# EAGLE board STM32F050F Base (EAGLE 6.5.0)

Size 69.85 x 22.85 mm. Coordinates in mm from the lower left corner, seen from the top.
Outline: 0,0 69.85,0 69.85,22.85 0,22.85 0,0
Copper layers (1*16): Top 0.035mm / dielectric 1.5mm / Bottom 0.035mm
Design rules "default": minimum track width 10mil, minimum drill 24mil, track to track 8mil, track to pad 8mil, pad to pad 8mil, via to via 8mil, smd to smd 8mil, copper to edge 40mil, drill to drill 8mil, minimum pad ring 10mil, minimum via ring 8mil, stop-mask expansion 4mil, vias tented up to drill 0mil, thermal gap 10mil

## Footprints (pad centres in the part's own frame; a part is rotated, then mirrored left to right if it is on the bottom)
C3216-18/T = smd 1.95 x 1.5: + 1.651,0; - -1.651,0
C3528-21/T = smd 1.778 x 2.286: + 1.524,0; - -1.524,0
C1206 = smd 1.3 x 1.6: 1 -1.524,0; 2 1.524,0
C0805 = smd 1.2 x 1.3: 1 -1.016,0; 2 1.016,0
1X01-S = drill 1.016 square: 1 0,0
SOT223 = smd 1.219 x 2.235: 1 -2.311,-3.099; 2 0,-3.099; 3 2.311,-3.099 | smd 3.6 x 2.2: 4 0,3.099
CHIP-LED0805 = smd 1.2 x 1.2: A 0,-1.05; C 0,1.05
1X05-S = drill 1.016 square: 1 -5.08,0 | drill 1.016 octagon: 2 -2.54,0; 3 0,0; 4 2.54,0; 5 5.08,0
1X03-S = drill 1.016 square: 1 -2.54,0 | drill 1.016 octagon: 2 0,0; 3 2.54,0
1X02-S = drill 1.016 square: 1 -1.27,0 | drill 1.016 octagon: 2 1.27,0
1X02/90-S = drill 1.016 square: 1 -2.54,-3.81 | drill 1.016 octagon: 2 0,-3.81
R0805 = smd 1.2 x 1.3: 1 -1.016,0; 2 1.016,0
TSSOP20 = smd 0.305 x 0.991: 1 -2.925,-2.918; 2 -2.275,-2.918; 3 -1.625,-2.918; 4 -0.975,-2.918; 5 -0.325,-2.918; 6 0.325,-2.918; 7 0.975,-2.918; 8 1.625,-2.918; 9 2.275,-2.918; 10 2.925,-2.918; 11 2.925,2.918; 12 2.275,2.918; 13 1.625,2.918; 14 0.975,2.918; 15 0.325,2.918; 16 -0.325,2.918; 17 -0.975,2.918; 18 -1.625,2.918; 19 -2.275,2.918; 20 -2.925,2.918
SMA = smd 2 x 2: A 2,0; C -2,0

## Placement (x,y rotation side)
C1  10uF 10V  [C3216-18/T]  31.75,11.43 90 top
C2  10uF 25V  [C3528-21/T]  16.51,11.43 270 top
C4  4.7uF  [C1206]  45.09,3.81 0 top
C5  0.1uF  [C0805]  48.26,6.35 0 top
C6  1uf  [C0805]  48.26,17.78 270 top
GND  [1X01-S]  66.04,3.81 0 top
IC1  [SOT223]  24.13,11.43 90 top
LED1  [CHIP-LED0805]  38.1,11.43 180 top
NRST  [1X01-S]  53.34,19.05 0 top
PA0-4  [1X05-S]  30.48,19.05 180 top
PA5-7  [1X03-S]  20.32,3.81 0 top
PA9-10  [1X02-S]  52.07,3.81 0 top
PA13-14  [1X02-S]  59.69,3.81 0 top
PB1  [1X01-S]  30.48,3.81 0 top
PF0-1  [1X02-S]  59.69,19.05 180 top
PWR  [1X02/90-S]  1.27,12.7 90 top
PWR_OUT  [1X02-S]  19.05,19.05 180 top
R1  [R0805]  35.56,12.7 270 top
U$1  STM32F050F4P6  [TSSOP20]  48.26,11.43 180 top
U$2  10MQ040  [SMA]  10.16,11.43 180 top
VDD  [1X01-S]  66.04,19.05 0 top
VDD_GND_1  [1X02-S]  41.91,19.05 180 top
VDD_GND_2  [1X02-S]  8.89,3.81 0 top
VDD_GND_3  [1X02-S]  8.89,19.05 180 top
VDD_GND_4  [1X02-S]  36.83,3.81 0 top

## Library data of the parts
C1 C2 C4-C6 R1 = rc-master-smd
GND NRST PA0-4 PA5-7 PA9-10 PA13-14 PB1 PF0-1 PWR PWR_OUT VDD VDD_GND_1-VDD_GND_4 = pinhead-2
IC1 = v-reg-3
LED1 = led
U$1 = STM32F0
U$2 = my-library

## Nets
+3V3: C1.+ C4.2 C5.2 C6.2 IC1.2 R1.1 U$1.5 U$1.16 VDD.1 VDD_GND_1.1 VDD_GND_2.1 VDD_GND_3.1 VDD_GND_4.1
+12V: PWR.1 U$2.A
GND: C1.- C2.- C4.1 C5.1 C6.1 GND.1 IC1.1 LED1.C PWR.2 PWR_OUT.2 U$1.1 U$1.15 VDD_GND_1.2 VDD_GND_2.2 VDD_GND_3.2 VDD_GND_4.2
N$2: LED1.A R1.2
N$6: PA13-14.2 U$1.20
N$7: PA13-14.1 U$1.19
N$8: PF0-1.1 U$1.2
N$9: PF0-1.2 U$1.3
N$10: PA5-7.1 U$1.11
N$11: PA0-4.1 U$1.6
N$12: PA0-4.2 U$1.7
N$13: PA0-4.3 U$1.8
N$14: PA0-4.4 U$1.9
N$15: PA0-4.5 U$1.10
N$16: PA5-7.2 U$1.12
N$17: PA5-7.3 U$1.13
N$18: PB1.1 U$1.14
N$19: PA9-10.1 U$1.17
N$20: PA9-10.2 U$1.18
N$23: C2.+ IC1.3 PWR_OUT.1 U$2.C
NRST: NRST.1 U$1.4

## Tracks (layer width: path | path; a pad name or v marks a point on that pad's centre or on a via)
+3V3  (12 unrouted)
+12V  (1 unrouted)
GND  (15 unrouted)
N$2  (1 unrouted)
N$6  (1 unrouted)
N$7  (1 unrouted)
N$8  (1 unrouted)
N$9  (1 unrouted)
N$10  (1 unrouted)
N$11  (1 unrouted)
N$12  (1 unrouted)
N$13  (1 unrouted)
N$14  (1 unrouted)
N$15  (1 unrouted)
N$16  (1 unrouted)
N$17  (1 unrouted)
N$18  (1 unrouted)
N$19  (1 unrouted)
N$20  (1 unrouted)
N$23  (3 unrouted)
NRST  (1 unrouted)